# Altium PCB Relay Output.PcbDoc
Units mil, origin at the board's own origin, x right, y up, seen from the top; angles counter-clockwise.
Board outline 3336.61 x 3031.5 mil, 2 copper layers (Top Layer, Bottom Layer); 63 components, 81 nets, 348 pads, 27 vias.
Unrouted connection lines stored in the file: 6.
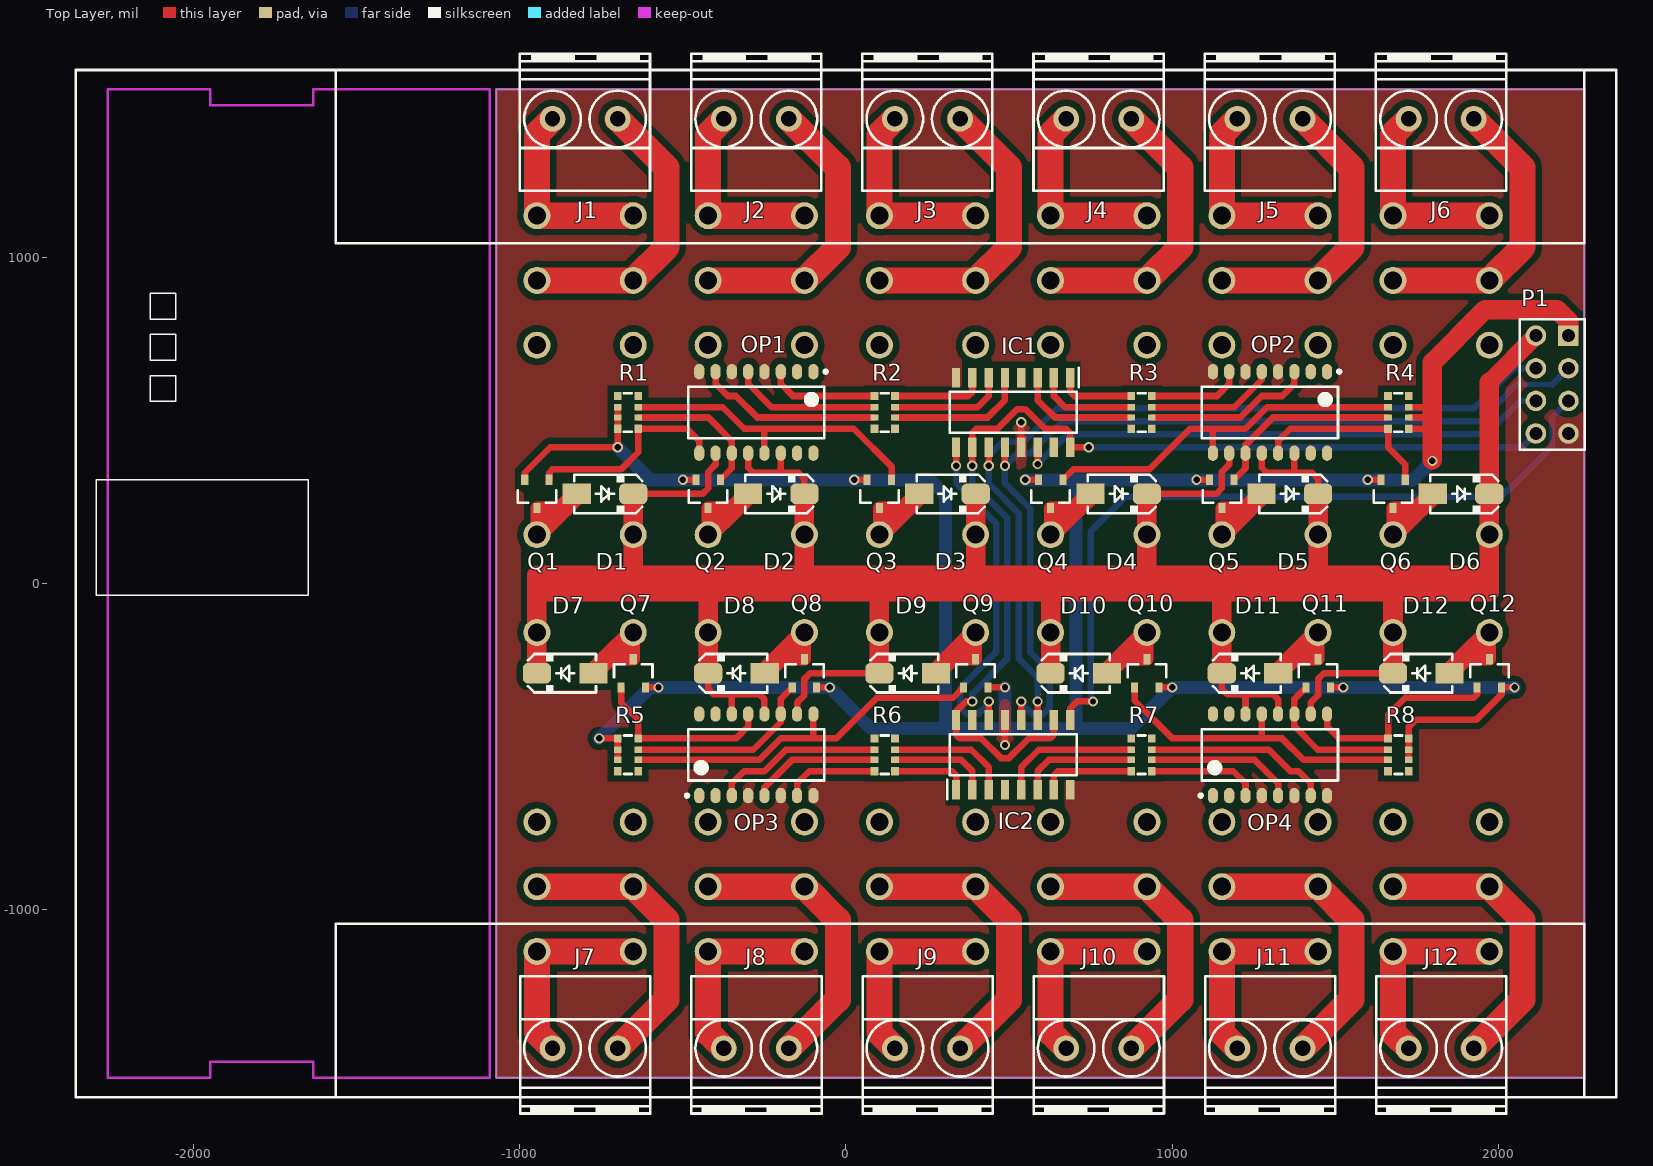
[diagram p0: Top Layer view]
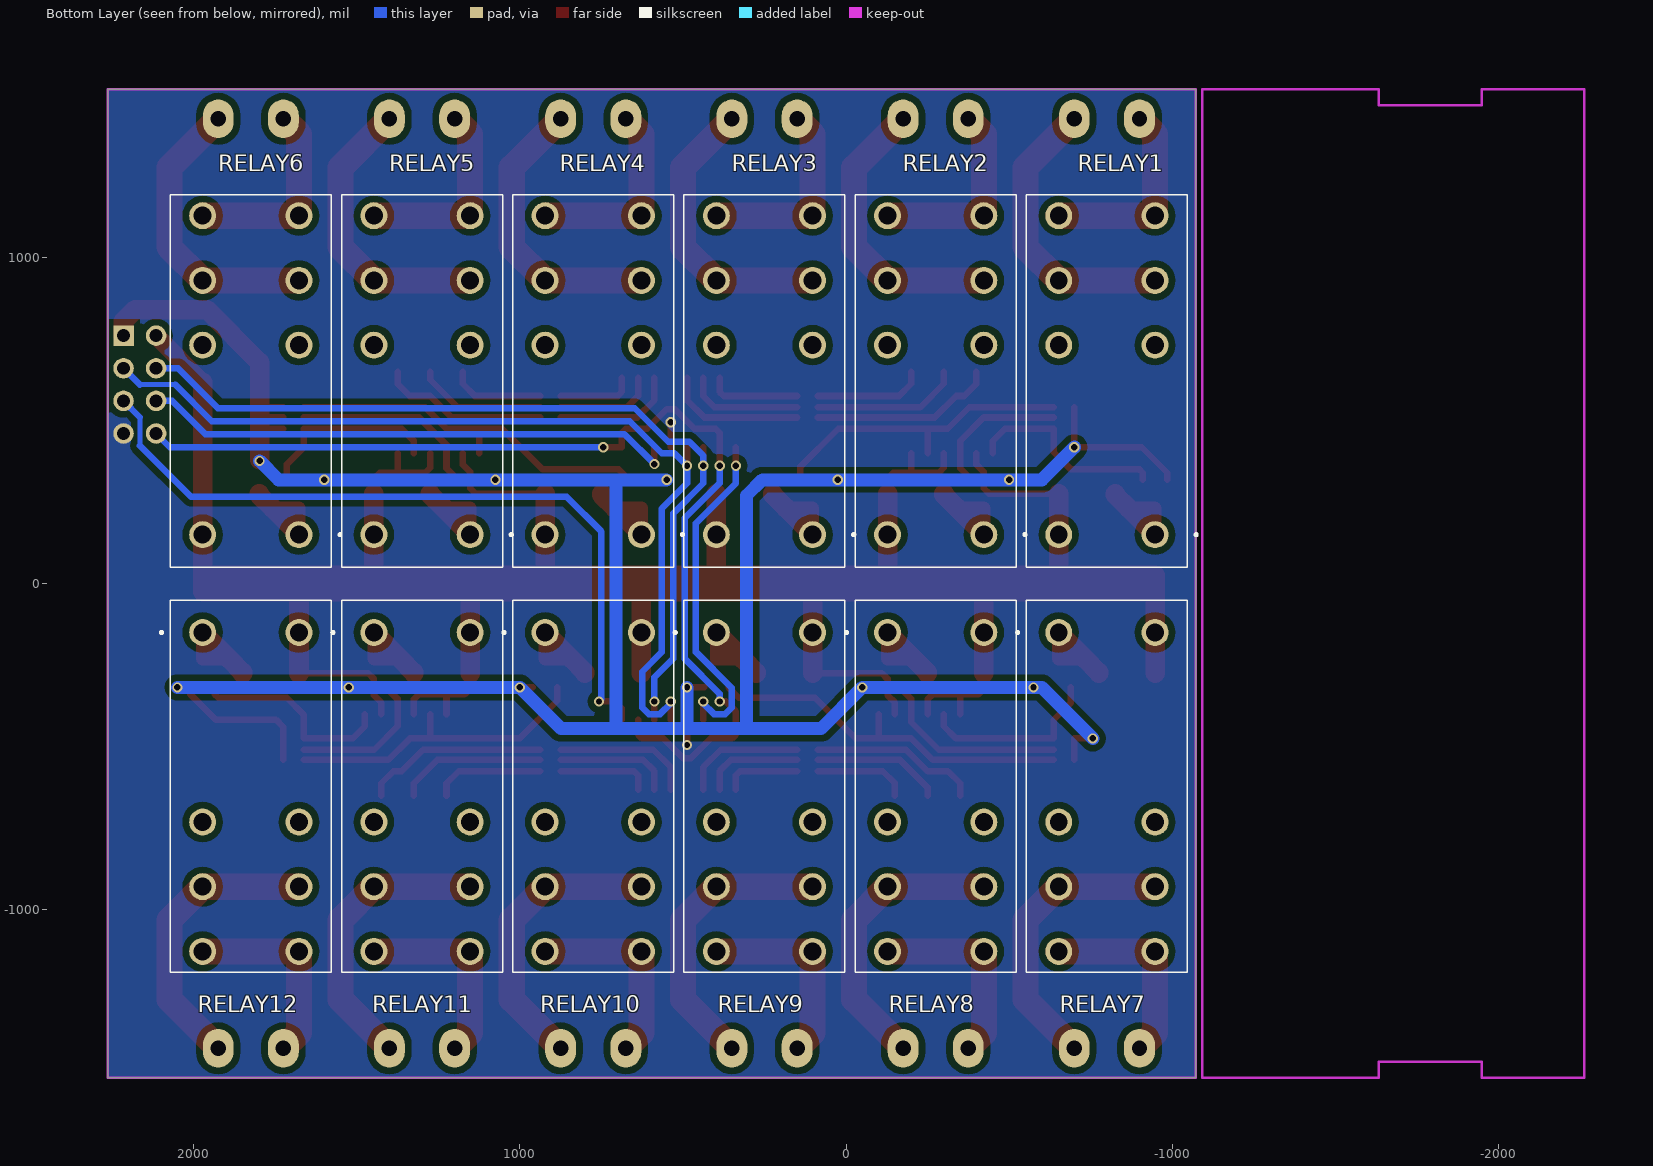
[diagram p1: Bottom Layer view, seen from below]
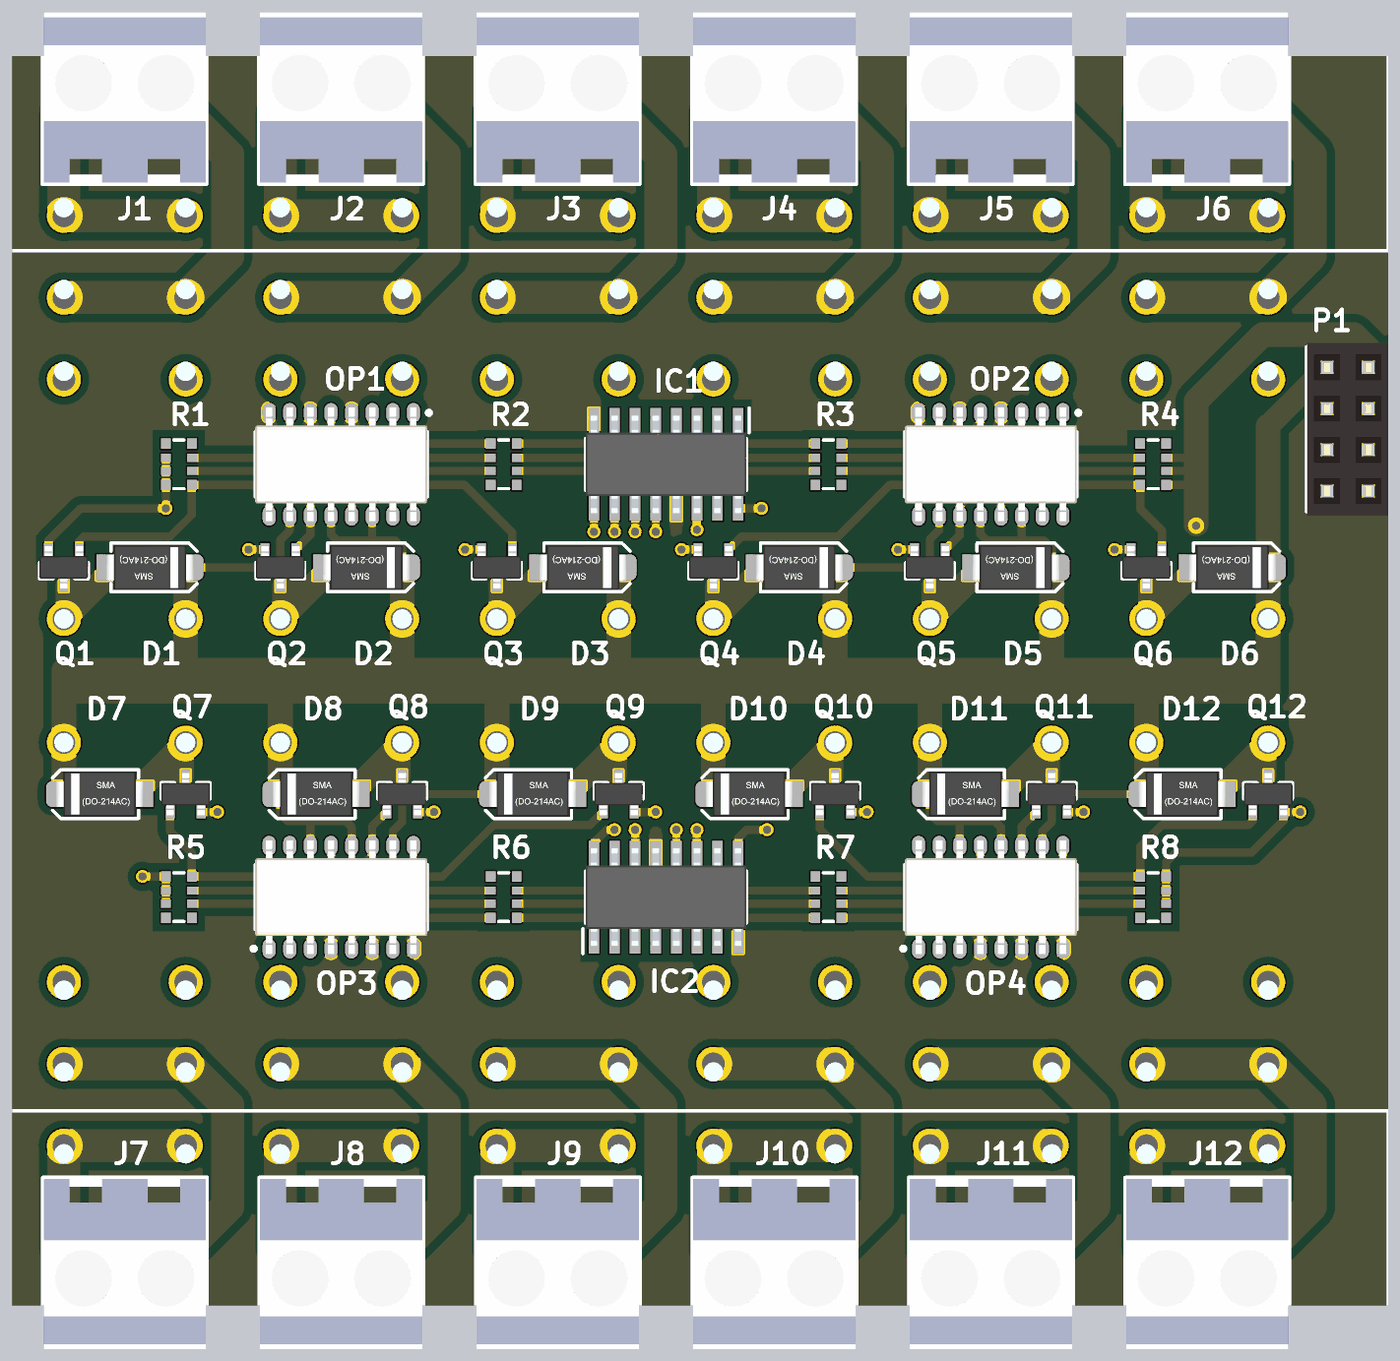
[diagram p2: 3D render of the assembled board from above, using the file's embedded part models]
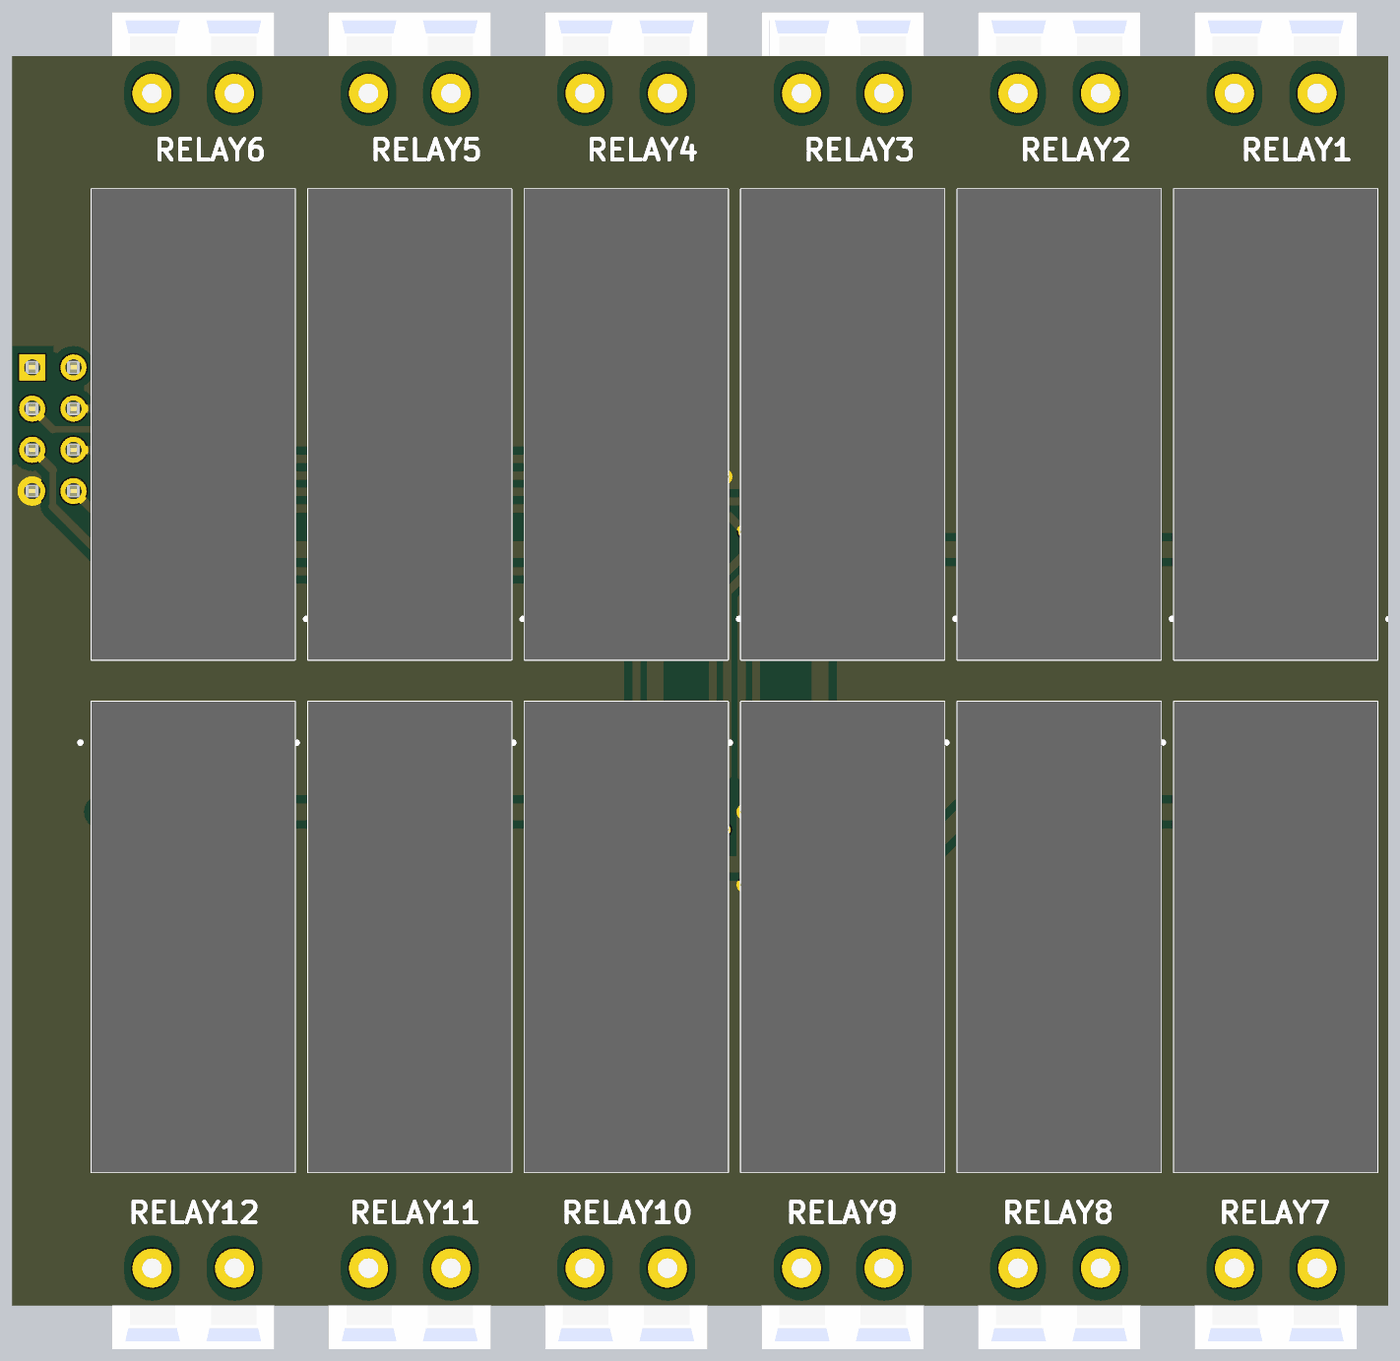
[diagram p3: 3D render of the assembled board from below, using the file's embedded part models]

## Layer stack, top to bottom
Top Solder: solder mask 0.4, Solder Resist, Dk 3.5
Top Layer: signal copper 1.4
Dielectric 1: dielectric 12.6, FR-4, Dk 4.8
Bottom Layer: signal copper 1.4
Bottom Solder: solder mask 0.4, Solder Resist, Dk 3.5

## Board outline
-1072.83,-1515.75 -1072.83,1515.75 2263.78,1515.75 2263.78,-1515.75

## Design rules (kind name [scope] priority, off if disabled: settings)
Clearance Clearance_2 [InNamedPolygon('GND_L02_P036')] p1: gap=20 ignorepadtopadclearanceinfootprint=FALSE
Clearance Clearance_1 [InNamedPolygon('GND_L01_P034')] p2: gap=20 ignorepadtopadclearanceinfootprint=FALSE
Clearance [All] p3: gap=11 ignorepadtopadclearanceinfootprint=FALSE
MinimumSolderMaskSliver [All] p1: minsoldermaskwidth=3
PolygonConnect [All] p1: connectstyle=Direct reliefconductorwidth=10 reliefentries=4 polygonreliefangle="90 Angle" airgapwidth=10
RoutingVias [All] p1: holewidth=28 width=50 viastyle="Through Hole" minholewidth=19.68 minwidth=31.5 maxholewidth=28 maxwidth=50
SilkToSolderMaskClearance [IsPad] p1: minsilkscreentomaskgap=3 clearancetoexposedcopper=TRUE
SolderMaskExpansion [All] p1: expansion=4
Width [All] p1: maxlimit=100 minlimit=10 preferedwidth=20
28 further rules are at their usual default settings.

## Components (designator, comment, footprint, x,y, rotation, side; value= is the part's Value field where it differs from the comment)
D1 "1N4007" D_SMA -738.98,275 r0 top
D2 "1N4007" D_SMA -213.98,275 r0 top
D3 "1N4007" D_SMA 311.02,275 r0 top
D4 "1N4007" D_SMA 836.02,275 r0 top
D5 "1N4007" D_SMA 1361.02,275 r0 top
D6 "1N4007" D_SMA 1886.02,275 r0 top
D7 "1N4007" D_SMA -861.02,-275 r180 top
D8 "1N4007" D_SMA -336.02,-275 r180 top
D9 "1N4007" D_SMA 188.98,-275 r180 top
D10 "1N4007" D_SMA 713.98,-275 r180 top
D11 "1N4007" D_SMA 1238.98,-275 r180 top
D12 "1N4007" D_SMA 1763.98,-275 r180 top
IC1 "SN74HC595D" SOIC127P600X175-16N 512.5,525 r270 top
IC2 "SN74HC595D" SOIC127P600X175-16N 512.5,-525 r90 top
J1 "CONN_TB2" TBG_2 -800,1425 r0 top
J2 "CONN_TB2" TBG_2 -275,1425 r0 top
J3 "CONN_TB2" TBG_2 250,1425 r0 top
J4 "CONN_TB2" TBG_2 775,1425 r0 top
J5 "CONN_TB2" TBG_2 1300,1425 r0 top
J6 "CONN_TB2" TBG_2 1825,1425 r0 top
J7 "CONN_TB2" TBG_2 -800,-1425 r180 top
J8 "CONN_TB2" TBG_2 -275,-1425 r180 top
J9 "CONN_TB2" TBG_2 250,-1425 r180 top
J10 "CONN_TB2" TBG_2 775,-1425 r180 top
J11 "CONN_TB2" TBG_2 1300,-1425 r180 top
J12 "CONN_TB2" TBG_2 1825,-1425 r180 top
OP1 "TLP281-4" "SO16 TOSHIBA OPTOCOUPLER" -275,525 r270 top
OP2 "TLP281-4" "SO16 TOSHIBA OPTOCOUPLER" 1300,525 r270 top
OP3 "TLP281-4" "SO16 TOSHIBA OPTOCOUPLER" -275,-525 r90 top
OP4 "TLP281-4" "SO16 TOSHIBA OPTOCOUPLER" 1300,-525 r90 top
P1 "Header 2X4" "HDR 2X4 F ST 2.54" 2165.35,610.24 r270 top
Q1 "MOSFET N" SOT23 -947.64,275 r270 top
Q2 "MOSFET N" SOT23 -422.64,275 r270 top
Q3 "MOSFET N" SOT23 102.36,275 r270 top
Q4 "MOSFET N" SOT23 627.36,275 r270 top
Q5 "MOSFET N" SOT23 1152.36,275 r270 top
Q6 "MOSFET N" SOT23 1677.36,275 r270 top
Q7 "MOSFET N" SOT23 -652.36,-275 r90 top
Q8 "MOSFET N" SOT23 -127.36,-275 r90 top
Q9 "MOSFET N" SOT23 397.64,-275 r90 top
Q10 "MOSFET N" SOT23 922.64,-275 r90 top
Q11 "MOSFET N" SOT23 1447.64,-275 r90 top
Q12 "MOSFET N" SOT23 1972.64,-275 r90 top
R1 "10KΩ" "RES ARRAY 4X0603 10K" -668.75,525 r90 top
R2 "1KΩ" "RES ARRAY 4X0603 1K" 118.75,525 r90 top
R3 "1KΩ" "RES ARRAY 4X0603 1K" 906.25,525 r270 top
R4 "10KΩ" "RES ARRAY 4X0603 10K" 1693.75,525 r270 top
R5 "10KΩ" "RES ARRAY 4X0603 10K" -668.75,-525 r90 top
R6 "1KΩ" "RES ARRAY 4X0603 1K" 118.75,-525 r90 top
R7 "1KΩ" "RES ARRAY 4X0603 1K" 906.25,-525 r270 top
R8 "10KΩ" "RES ARRAY 4X0603 10K" 1693.75,-525 r270 top
RELAY1 "1-1393243-3" 113932433 -947.64,150 r90 bottom
RELAY2 "1-1393243-3" 113932433 -422.64,150 r90 bottom
RELAY3 "1-1393243-3" 113932433 102.36,150 r90 bottom
RELAY4 "1-1393243-3" 113932433 627.36,150 r90 bottom
RELAY5 "1-1393243-3" 113932433 1152.36,150 r90 bottom
RELAY6 "1-1393243-3" 113932433 1677.36,150 r90 bottom
RELAY7 "1-1393243-3" 113932433 -652.36,-150 r270 bottom
RELAY8 "1-1393243-3" 113932433 -127.36,-150 r270 bottom
RELAY9 "1-1393243-3" 113932433 397.64,-150 r270 bottom
RELAY10 "1-1393243-3" 113932433 922.64,-150 r270 bottom
RELAY11 "1-1393243-3" 113932433 1447.64,-150 r270 bottom
RELAY12 "1-1393243-3" 113932433 1972.64,-150 r270 bottom

## Footprints (in the part's own frame and the unit in brackets; to place one, negate y for a bottom-side part, rotate by r counter-clockwise, add the part's x,y. Pads: shape width x height; smd on the part's side, far side on the other; paste and mask are expansions set on the pad)
113932433 [mm]
  round 2.1 hole 1.4: 11(19.8,0) 12(14.76,0) 14(24.84,0) 21(19.8,7.5) 22(14.76,7.5) 24(24.84,7.5) A1(0,0) A2(0,7.5)
  silkscreen extent -2.52,-3.3 26.48,10.02, body extent -2.52,-2.52 26.48,10.02, height 15.8
D_SMA [mm] "SMA Molded Diode, 2-Leads, Body 4.3x2.7mm, SOD-128"
  rect 2.2x1.6 smd: 1(-2.2,0)
  rrect50% 2.2x1.6 smd: 2(2.2,0)
  silkscreen extent -2.4,-1.5 2.9,1.5, body extent -2.75,-1.4 2.75,1.4, height 2.6
"HDR 2X4 F ST 2.54" [mm]
  rect 1.6x1.6 hole 1: 1(-3.81,1.27)
  round 1.6 hole 1: 2(-3.81,-1.27) 3(-1.27,1.27) 4(-1.27,-1.27) 5(1.27,1.27) 6(1.27,-1.27) 7(3.81,1.27) 8(3.81,-1.27)
  silkscreen extent -5.08,-2.54 5.08,2.54, body extent -5.33,-2.5 5.33,2.5, height 8.5
"RES ARRAY 4X0603 1K" [mm]
  rect 0.65x0.6 smd: 1(-1.275,-0.8) 4(1.275,-0.8) 5(1.275,0.8) 8(-1.275,0.8)
  rect 0.5x0.6 smd: 2(-0.4,-0.8) 3(0.4,-0.8) 6(0.4,0.8) 7(-0.4,0.8)
  silkscreen extent -1.5,-0.3 1.5,0.3, body extent -1.6,-0.8 1.6,0.8, height 0.56
"RES ARRAY 4X0603 10K" [mm]
  rect 0.65x0.6 smd: 1(-1.275,-0.8) 4(1.275,-0.8) 5(1.275,0.8) 8(-1.275,0.8)
  rect 0.5x0.6 smd: 2(-0.4,-0.8) 3(0.4,-0.8) 6(0.4,0.8) 7(-0.4,0.8)
  silkscreen extent -1.5,-0.3 1.5,0.3, body extent -1.6,-0.8 1.6,0.8, height 0.56
"SO16 TOSHIBA OPTOCOUPLER" [mm] "SOIC, 16-Leads, Body 10.35x4.60mm, Pitch 1.27mm, IPC High Density"
  oval 1.2x0.8 smd: 1(-3.175,4.445) 2(-3.175,3.175) 3(-3.175,1.905) 4(-3.175,0.635) 5(-3.175,-0.635) 6(-3.175,-1.905) 7(-3.175,-3.175) 8(-3.175,-4.445) 9(3.175,-4.445) 10(3.175,-3.175) 11(3.175,-1.905) 12(3.175,-0.635) 13(3.175,0.635) 14(3.175,1.905) 15(3.175,3.175) 16(3.175,4.445)
  silkscreen extent -3.3,-5.3 2,5.52, body extent -3.5,-5.3 3.5,5.3, height 2.2
SOIC127P600X175-16N [mm]
  rect 1.525x0.65 smd: 1(-2.712,4.445) 2(-2.712,3.175) 3(-2.712,1.905) 4(-2.712,0.635) 5(-2.712,-0.635) 6(-2.712,-1.905) 7(-2.712,-3.175) 8(-2.712,-4.445) 9(2.712,-4.445) 10(2.712,-3.175) 11(2.712,-1.905) 12(2.712,-0.635) 13(2.712,0.635) 14(2.712,1.905) 15(2.712,3.175) 16(2.712,4.445)
  silkscreen extent -3.47,-4.95 1.6,5.12, body extent -3,-4.95 3,4.95, height 1.75
SOT23 [mm] "SOT23, 3-Leads, Body 2.90x2.45mm, Pitch 0.95mm, IPC High Density"
  rect 0.8x0.55 smd: 1(-1.1,0.95) 2(-1.1,-0.95) 3(1.1,0)
  silkscreen extent -0.3,-1.5 0.7,1.5, body extent -1.3,-1.5 1.3,1.5, height 1.1
TBG_2 [mm] "Terminal Block Green"
  round 2 / inner round 2 / far side oval 2.4x3 hole 1.2: 1(-2.54,0) 2(2.54,0)
  silkscreen extent -5.08,-5.6 5.05,5.08, body extent -5,-5.5 5,5, height 14

## Part data
D1 D2 D3 D4 D5 D6 D7 D8 D9 D10 D11 D12: library part DIODE_SMD_1N4007, "DIODE, GENERAL PURPOSE, 1000V/1A", =http://www.chila.ir, ASSEMBLY=ASSEMBLY, DESC=DESCRIPTION, MANF=Kingtronics, MANF_P#=M7, PARAM="1000V VRRM", PARAM2=1A, PRICE=PRICE
IC1 IC2: "8-Bit Shift Register With 3-State Output Register", Case=SOIC16, Manufacturer="TEXAS INSTRUMENTS", Author="CERN DEM JLC", Bonding=No, ComponentHeight=1.75mm, Component Type=Standard, CreateDate=6/5/2012, Device=SN74HC595D, HelpURL=\\cern.ch\dfs\Applications\Altium\Datasheets\SN74HC595D.pdf, LatestRevisionDate=6/5/2012, Manufacturer Part Number=SN74HC595D, Mounted=Yes, PackageDescription="SOIC 16, Pitch 1.27mm - Body 4x10mm, IPC Medium Density", Part Description="8-Bit Shift Register With 3-State Output Registers", Part Number=SN74HC595D, Pin Count=16, PressFit=No, Sense=No, SMD=Yes, Socket=No
J1 J2 J3 J4 J5 J6 J7 J8 J9 J10 J11 J12: "CONN, TERMINAL BLOCK, 5.08mm pitch", =http://www.chila.ir
R1 R4 R5 R8: library part "RES ARRAY 10K"
R2 R3 R6 R7: library part "RES ARRAY 1K"
RELAY1 RELAY2 RELAY3 RELAY4 RELAY5 RELAY6 RELAY7 RELAY8 RELAY9 RELAY10 RELAY11 RELAY12: "Connector", Manufacturer_Name="TE Connectivity", Mouser Part Number=655-1-1393243-3, Arrow Part Number=1-1393243-3, Datasheet Link=https://www.mouser.com/datasheet/2/418/NG_DS_RT2_1014-579056.pdf, Height=15.7mm, Manufacturer_Part_Number=1-1393243-3, Mouser Price/Stock=https://www.mouser.co.uk/ProductDetail/TE-Connectivity-Schrack/1-1393243-3?qs=8%252BfS01R0SwJTLBx3JmwCzA%3D%3D

## Via types
v1: diameter 31.5, hole 19.68, Top Layer to Bottom Layer, 27 vias

## Nets (pads, with @x,y where several pads share a name; then routed paths per layer and width w, separated by ;. In a path a pad name is that pad's centre, name@x,y a point inside that pad or via, vN(x,y) a via of type N, cw(c..) or ccw(c..) an arc to the next point about the centre after c; other vN are vias at no path point)
+3.3: IC1.10 IC1.16 IC2.10 IC2.16 P1.8 | length 3299.8
  Top Layer w20: v1(387.5,-361.46) 368.54,-361.46 337.5,-392.5 IC2.16 337.5,-462.5 349.8,-474.8 414.8,-474.8 475,-535 500,-535 560.2,-474.8 625.2,-474.8 637.5,-462.5 IC2.10 ; v1(387.5,361.46) IC1.10 387.5,462.5 399.8,474.8 464.8,474.8 525,535 550,535 610.2,474.8 675.2,474.8 687.5,462.5 IC1.16 v1(744.27,418.23)
  Bottom Layer w20: v1(387.5,-361.46) 387.5,-337.5 495,-230 495,200 387.5,307.5 v1(387.5,361.46) ; v1(744.27,418.23) 2073.35,418.23 P1.8
+VS: D1.2 D2.2 D3.2 D4.2 D5.2 D6.2 D7.2 D8.2 D9.2 D10.2 D11.2 D12.2 OP1.10 OP1.12 OP1.14 OP2.10 OP2.12 OP2.14 OP3.10 OP3.12 OP3.14 OP4.10 OP4.12 OP4.14 P1.2 RELAY1.A2 RELAY2.A2 RELAY3.A2 RELAY4.A2 RELAY5.A2 RELAY6.A2 RELAY7.A2 RELAY8.A2 RELAY9.A2 RELAY10.A2 RELAY11.A2 RELAY12.A2 | length 12754.7
  Top Layer w20: D1.2 -440,275 -422.64,292.36 -422.64,342.36 -400,365 OP1.10 ; D8.2 -422.64,-322.36 -405,-340 -350,-340 ; OP3.14 -350,-340 ; OP1.12 -300,355 -285,340 -200,340 ; OP3.12 -250,-355 -265,-340 -350,-340 ; OP1.14 -200,340 ; OP3.10 -150,-365 -127.36,-342.36 -127.36,-292.36 -110,-275 D9.2 ; D2.2 -127.36,322.36 -145,340 -200,340 ; D4.2 1135,275 1152.36,292.36 1152.36,342.36 1175,365 OP2.10 ; D11.2 1152.36,-322.36 1170,-340 1225,-340 ; OP4.14 1225,-340 ; OP2.12 1275,355 1290,340 1375,340 ; OP4.12 1325,-355 1310,-340 1225,-340 ; OP2.14 1375,340 ; OP4.10 1425,-365 1447.64,-342.36 1447.64,-292.36 1465,-275 D12.2 ; D5.2 1447.64,322.36 1430,340 1375,340
  Top Layer w55: 1972.64,617.52 P1.2
  Top Layer w60: D7.2 RELAY7.A2 -947.64,-25 ; D1.2 RELAY1.A2 -652.36,25 ; D8.2 RELAY8.A2 -422.64,-25 ; D2.2 RELAY2.A2 -127.36,25 ; D9.2 RELAY9.A2 102.36,-25 ; D3.2 RELAY3.A2 397.64,25 ; D10.2 RELAY10.A2 627.36,-25 ; D4.2 RELAY4.A2 922.64,25 ; D11.2 RELAY11.A2 1152.36,-25 ; D5.2 RELAY5.A2 1447.64,25 ; D12.2 RELAY12.A2 1677.36,-25 ; 1972.64,617.52 D6.2 RELAY6.A2 1972.64,25 ; -947.64,-25 -947.64,25 -652.36,25 ; -947.64,-25 -652.36,-25 ; -652.36,-25 -422.64,-25 ; -652.36,-25 -652.36,25 ; -652.36,25 -422.64,25 ; -422.64,-25 -127.36,-25 ; -422.64,-25 -422.64,25 ; -422.64,25 -127.36,25 ; -127.36,-25 102.36,-25 ; -127.36,-25 -127.36,25 ; -127.36,25 102.36,25 ; 102.36,-25 397.64,-25 ; 102.36,-25 102.36,25 ; 102.36,25 397.64,25 ; 397.64,-25 627.36,-25 ; 397.64,-25 397.64,25 ; 397.64,25 627.36,25 ; 627.36,-25 922.64,-25 ; 627.36,-25 627.36,25 ; 627.36,25 922.64,25 ; 922.64,-25 1152.36,-25 ; 922.64,-25 922.64,25 ; 922.64,25 1152.36,25 ; 1152.36,-25 1447.64,-25 ; 1152.36,-25 1152.36,25 ; 1152.36,25 1447.64,25 ; 1447.64,-25 1677.36,-25 ; 1447.64,-25 1447.64,25 ; 1447.64,25 1677.36,25 ; 1677.36,-25 1972.64,-25 1972.64,25 ; 1677.36,-25 1677.36,25 ; 1677.36,25 1972.64,25
-VS: P1.1 Q1.2 Q2.2 Q3.2 Q4.2 Q5.2 Q6.2 Q7.2 Q8.2 Q9.2 Q10.2 Q11.2 Q12.2 R1.6 R1.7 R1.8 R4.5 R4.6 R4.7 R5.5 R5.6 R5.7 R8.6 R8.7 R8.8 | length 9465.7
  Top Layer w20: Q1.2 -985.04,339.96 -907.01,417.99 v1(-700.25,418.03) ; v1(-757.02,-474.8) R5.5 R5.6 R5.7 ; v1(-700.25,418.03) R1.8 R1.7 R1.6 ; Q7.2 v1(-574.96,-318.31) ; v1(-500.04,318.31) Q2.2 ; Q8.2 v1(-49.96,-318.31) ; v1(24.96,318.31) Q3.2 ; Q9.2 v1(487.5,-318.31) ; v1(549.96,318.31) Q4.2 ; Q10.2 v1(1000.04,-318.31) ; v1(1074.96,318.31) Q5.2 ; Q11.2 v1(1525.04,-318.31) ; v1(1599.96,318.31) Q6.2 ; R8.6 R8.7 R8.8 1725.25,-439.75 1747.99,-417.01 1932.99,-417.01 2010.04,-339.96 Q12.2 v1(2050.04,-318.31) ; R4.5 1797.99,474.8 ; R4.6 1797.99,509.25 ; R4.7 1797.99,540.75
  Top Layer w60: v1@1797.99,380 1797.99,474.8 1797.99,509.25 1797.99,540.75 1797.99,677.99 1960,840 2180,840 2215.35,804.65 P1.1
  Bottom Layer w40: v1(-757.02,-474.8) -600.52,-318.31 v1(-574.96,-318.31) v1(-49.96,-318.31) 76.73,-445 305,-445 ; v1(-700.25,418.03) -600.52,318.31 v1(-500.04,318.31) v1(24.96,318.31) 256.69,318.31 305,270 305,-445 ; v1(487.5,-318.31) 487.5,-445 ; v1(549.96,318.31) 705,318.31 ; v1(1798.07,376.14) 1740.24,318.31 v1(1599.96,318.31) v1(1074.96,318.31) 705,318.31 ; v1(2050.04,-318.31) v1(1525.04,-318.31) v1(1000.04,-318.31) 873.35,-445 705,-445 ; 305,-445 487.5,-445 ; 487.5,-445 705,-445 ; 705,-445 705,318.31
GND: IC1.8 IC1.13 IC2.8 IC2.13 OP1.4 OP1.6 OP1.8 OP2.4 OP2.6 OP2.8 OP3.4 OP3.6 OP3.8 OP4.4 OP4.6 OP4.8 P1.7 | length 153.5
  Top Layer w20: v1(487.5,-495) IC2.13 ; IC1.13 v1(537.5,495)
NetD1_1: D1.1 Q1.3 RELAY1.A1 | length 338.9
  Top Layer w40: RELAY1.A1 Q1.3 -865.94,231.69
  Top Layer w60: RELAY1.A1 -865.94,231.69 -825.59,272.05 D1.1
NetD2_1: D2.1 Q2.3 RELAY2.A1 | length 338.9
  Top Layer w40: RELAY2.A1 Q2.3 -340.94,231.69
  Top Layer w60: RELAY2.A1 -340.94,231.69 -300.59,272.05 D2.1
NetD3_1: D3.1 Q3.3 RELAY3.A1 | length 338.9
  Top Layer w40: RELAY3.A1 Q3.3 184.06,231.69
  Top Layer w60: RELAY3.A1 184.06,231.69 224.41,272.05 D3.1
NetD4_1: D4.1 Q4.3 RELAY4.A1 | length 338.9
  Top Layer w40: RELAY4.A1 Q4.3 709.06,231.69
  Top Layer w60: RELAY4.A1 709.06,231.69 749.41,272.05 D4.1
NetD5_1: D5.1 Q5.3 RELAY5.A1 | length 338.9
  Top Layer w40: RELAY5.A1 Q5.3 1234.06,231.69
  Top Layer w60: RELAY5.A1 1234.06,231.69 1274.41,272.05 D5.1
NetD6_1: D6.1 Q6.3 RELAY6.A1 | length 338.9
  Top Layer w40: RELAY6.A1 Q6.3 1759.06,231.69
  Top Layer w60: RELAY6.A1 1759.06,231.69 1799.41,272.05 D6.1
NetD7_1: D7.1 Q7.3 RELAY7.A1 | length 338.9
  Top Layer w40: -734.06,-231.69 Q7.3 RELAY7.A1
  Top Layer w60: D7.1 -774.41,-272.05 -734.06,-231.69 RELAY7.A1
NetD8_1: D8.1 Q8.3 RELAY8.A1 | length 338.9
  Top Layer w40: -209.06,-231.69 Q8.3 RELAY8.A1
  Top Layer w60: D8.1 -249.41,-272.05 -209.06,-231.69 RELAY8.A1
NetD9_1: D9.1 Q9.3 RELAY9.A1 | length 338.9
  Top Layer w40: 315.94,-231.69 Q9.3 RELAY9.A1
  Top Layer w60: D9.1 275.59,-272.05 315.94,-231.69 RELAY9.A1
NetD10_1: D10.1 Q10.3 RELAY10.A1 | length 338.9
  Top Layer w40: 840.94,-231.69 Q10.3 RELAY10.A1
  Top Layer w60: D10.1 800.59,-272.05 840.94,-231.69 RELAY10.A1
NetD11_1: D11.1 Q11.3 RELAY11.A1 | length 338.9
  Top Layer w40: 1365.94,-231.69 Q11.3 RELAY11.A1
  Top Layer w60: D11.1 1325.59,-272.05 1365.94,-231.69 RELAY11.A1
NetD12_1: D12.1 Q12.3 RELAY12.A1 | length 338.9
  Top Layer w40: 1890.94,-231.69 Q12.3 RELAY12.A1
  Top Layer w60: D12.1 1850.59,-272.05 1890.94,-231.69 RELAY12.A1
NetIC1_1: IC1.1 R3.1 | length 236.6
  Top Layer w20: IC1.1 687.5,587.5 699.8,575.2 R3.1
NetIC1_2: IC1.2 R3.2 | length 308.2
  Top Layer w20: IC1.2 637.5,575 671.75,540.75 R3.2
NetIC1_3: IC1.3 R3.3 | length 378.6
  Top Layer w20: IC1.3 587.5,562.5 640.75,509.25 R3.3
NetIC1_5: IC1.5 R2.2 | length 428.6
  Top Layer w20: R2.2 434.25,509.25 487.5,562.5 IC1.5
NetIC1_6: IC1.6 R2.3 | length 358.2
  Top Layer w20: R2.3 403.25,540.75 437.5,575 IC1.6
NetIC1_7: IC1.7 R2.4 | length 286.6
  Top Layer w20: R2.4 375.2,575.2 387.5,587.5 IC1.7
NetIC1_9: IC1.9 IC2.14 | length 1066.6
  Top Layer w20: v1(337.5,361.46) IC1.9 ; IC2.14 v1(437.5,-361.46)
  Bottom Layer w20: v1(337.5,361.46) 337.5,307.5 460,185 460,-210 350,-320 350,-380 370,-400 405,-400 437.5,-367.5 v1(437.5,-361.46)
NetIC1_11: IC1.11 IC2.11 P1.4 | length 2718.4
  Top Layer w20: v1(437.5,361.46) IC1.11 ; IC2.11 v1(587.5,-361.46)
  Bottom Layer w20: v1(587.5,-361.46) 587.5,-287.5 530,-230 530,215 437.5,307.5 v1(437.5,361.46) 437.5,392.5 480,435 545,435 647.99,537.99 1925.79,537.99 2048.03,660.24 P1.4
NetIC1_12: IC1.12 IC2.12 P1.3 | length 2878.9
  Top Layer w20: v1(487.5,361.46) IC1.12 ; IC2.12 v1(537.5,-361.46)
  Bottom Layer w15: 2057.09,610.24 2165.35,610.24
  Bottom Layer w20: v1(537.5,-361.46) 537.5,-367.5 570,-400 605,-400 625,-380 625,-270 565,-210 565,230 487.5,307.5 v1(487.5,361.46) 526.04,400 565,400 662.99,497.99 1944.84,497.99 2057.09,610.24 ; 2165.35,610.24 P1.3
NetIC1_14: IC1.14 P1.6 | length 1659.9
  Top Layer w20: v1(587.5,366.46) IC1.14
  Bottom Layer w20: v1(587.5,366.46) 679.23,458.19 1964.09,458.19 2066.14,560.24 P1.6
NetIC2_1: IC2.1 R6.1 | length 236.6
  Top Layer w20: R6.1 325.2,-575.2 337.5,-587.5 IC2.1
NetIC2_2: IC2.2 R6.2 | length 308.2
  Top Layer w20: R6.2 353.25,-540.75 387.5,-575 IC2.2
NetIC2_3: IC2.3 R6.3 | length 378.6
  Top Layer w20: R6.3 384.25,-509.25 437.5,-562.5 IC2.3
NetIC2_5: IC2.5 R7.2 | length 428.6
  Top Layer w20: IC2.5 537.5,-562.5 590.75,-509.25 R7.2
NetIC2_6: IC2.6 R7.3 | length 358.2
  Top Layer w20: IC2.6 587.5,-575 621.75,-540.75 R7.3
NetIC2_7: IC2.7 R7.4 | length 286.6
  Top Layer w20: IC2.7 637.5,-587.5 649.8,-575.2 R7.4
NetIC2_9: IC2.9 P1.5 | length 2320.8
  Top Layer w20: IC2.9 687.5,-382.5 708.54,-361.46 v1(757.5,-361.46)
  Bottom Layer w15: 2165.35,423.23 2165.35,510.24
  Bottom Layer w20: v1(757.5,-361.46) 750,-353.96 750,159.45 856.3,265.75 2007.87,265.75 2165.35,423.23 ; 2165.35,510.24 P1.5
NetJ1_1: J1.1 RELAY1.14 RELAY1.24 | length 612.1
  Top Layer w80: J1.1 -947.64,1377.36 RELAY1.14 RELAY1.24
NetJ1_2: J1.2 RELAY1.11 RELAY1.21 | length 895.3
  Top Layer w80: RELAY1.11 RELAY1.21 -550,1031.89 -550,1275 J1.2
NetJ2_1: J2.1 RELAY2.14 RELAY2.24 | length 612.1
  Top Layer w80: J2.1 -422.64,1377.36 RELAY2.14 RELAY2.24
NetJ2_2: J2.2 RELAY2.11 RELAY2.21 | length 895.3
  Top Layer w80: RELAY2.11 RELAY2.21 -25,1031.89 -25,1275 J2.2
NetJ3_1: J3.1 RELAY3.14 RELAY3.24 | length 612.1
  Top Layer w80: J3.1 102.36,1377.36 RELAY3.14 RELAY3.24
NetJ3_2: J3.2 RELAY3.11 RELAY3.21 | length 895.3
  Top Layer w80: RELAY3.11 RELAY3.21 500,1031.89 500,1275 J3.2
NetJ4_1: J4.1 RELAY4.14 RELAY4.24 | length 612.1
  Top Layer w80: J4.1 627.36,1377.36 RELAY4.14 RELAY4.24
NetJ4_2: J4.2 RELAY4.11 RELAY4.21 | length 895.3
  Top Layer w80: RELAY4.11 RELAY4.21 1025,1031.89 1025,1275 J4.2
NetJ5_1: J5.1 RELAY5.14 RELAY5.24 | length 612.1
  Top Layer w80: J5.1 1152.36,1377.36 RELAY5.14 RELAY5.24
NetJ5_2: J5.2 RELAY5.11 RELAY5.21 | length 895.3
  Top Layer w80: RELAY5.11 RELAY5.21 1550,1031.89 1550,1275 J5.2
NetJ6_1: J6.1 RELAY6.14 RELAY6.24 | length 612.1
  Top Layer w80: J6.1 1677.36,1377.36 RELAY6.14 RELAY6.24
NetJ6_2: J6.2 RELAY6.11 RELAY6.21 | length 895.3
  Top Layer w80: RELAY6.11 RELAY6.21 2075,1031.89 2075,1275 J6.2
NetJ7_1: J7.1 RELAY7.11 RELAY7.21 | length 895.3
  Top Layer w80: RELAY7.21 RELAY7.11 -550,-1031.89 -550,-1275 J7.1
NetJ7_2: J7.2 RELAY7.14 RELAY7.24 | length 612.1
  Top Layer w80: J7.2 -947.64,-1377.36 RELAY7.24 RELAY7.14
NetJ8_1: J8.1 RELAY8.11 RELAY8.21 | length 895.3
  Top Layer w80: RELAY8.21 RELAY8.11 -25,-1031.89 -25,-1275 J8.1
NetJ8_2: J8.2 RELAY8.14 RELAY8.24 | length 612.1
  Top Layer w80: J8.2 -422.64,-1377.36 RELAY8.24 RELAY8.14
NetJ9_1: J9.1 RELAY9.11 RELAY9.21 | length 895.3
  Top Layer w80: RELAY9.21 RELAY9.11 500,-1031.89 500,-1275 J9.1
NetJ9_2: J9.2 RELAY9.14 RELAY9.24 | length 612.1
  Top Layer w80: J9.2 102.36,-1377.36 RELAY9.24 RELAY9.14
NetJ10_1: J10.1 RELAY10.11 RELAY10.21 | length 895.3
  Top Layer w80: RELAY10.21 RELAY10.11 1025,-1031.89 1025,-1275 J10.1
NetJ10_2: J10.2 RELAY10.14 RELAY10.24 | length 612.1
  Top Layer w80: J10.2 627.36,-1377.36 RELAY10.24 RELAY10.14
NetJ11_1: J11.1 RELAY11.11 RELAY11.21 | length 895.3
  Top Layer w80: RELAY11.21 RELAY11.11 1550,-1031.89 1550,-1275 J11.1
NetJ11_2: J11.2 RELAY11.14 RELAY11.24 | length 612.1
  Top Layer w80: J11.2 1152.36,-1377.36 RELAY11.24 RELAY11.14
NetJ12_1: J12.1 RELAY12.11 RELAY12.21 | length 895.3
  Top Layer w80: RELAY12.21 RELAY12.11 2075,-1031.89 2075,-1275 J12.1
NetJ12_2: J12.2 RELAY12.14 RELAY12.24 | length 612.1
  Top Layer w80: J12.2 1677.36,-1377.36 RELAY12.24 RELAY12.14
NetOP1_3: OP1.3 R2.5 | length 340.2
  Top Layer w20: OP1.3 -200,612.5 -162.7,575.2 R2.5
NetOP1_5: OP1.5 R2.6 | length 454.5
  Top Layer w20: OP1.5 -300,612.5 -228.25,540.75 R2.6
NetOP1_7: OP1.7 R2.7 | length 567.5
  Top Layer w20: OP1.7 -400,612.5 -362.7,575.2 -337.7,575.2 -271.75,509.25 R2.7
NetOP1_9: OP1.9 Q1.1 R1.1 | length 632.8
  Top Layer w20: Q1.1 -910.24,339.76 -900,350 -690,350 -637.25,402.75 R1.1 -487.3,474.8 -450,437.5 OP1.9
NetOP1_11: OP1.11 Q2.1 R1.2 | length 450.8
  Top Layer w20: R1.2 -421.75,509.25 -350,437.5 OP1.11 -350,353.54 Q2.1
NetOP1_13: OP1.13 Q3.1 R1.3 | length 967.8
  Top Layer w20: R1.3 -378.25,540.75 -312.3,474.8 -250,474.8 ; OP1.13 -250,474.8 ; Q3.1 139.76,359.02 23.98,474.8 -250,474.8
NetOP2_3: OP2.3 R3.6 | length 517.5
  Top Layer w20: R3.6 1209.25,509.25 1275.2,575.2 1337.7,575.2 1375,612.5 OP2.3
NetOP2_5: OP2.5 R3.7 | length 397.2
  Top Layer w20: R3.7 1190.75,540.75 1275,625 OP2.5
NetOP2_7: OP2.7 R3.8 | length 290.2
  Top Layer w20: R3.8 1137.7,575.2 1175,612.5 OP2.7
NetOP2_9: OP2.9 Q4.1 R4.2 | length 1164.4
  Top Layer w20: Q4.1 696.46,350 930,350 1054.8,474.8 1125,474.8 ; OP2.9 1125,474.8 ; R4.2 1290.75,540.75 1224.8,474.8 1125,474.8
NetOP2_11: OP2.11 Q5.1 R4.3 | length 593.4
  Top Layer w20: Q5.1 1225,353.54 OP2.11 1225,425 1309.25,509.25 R4.3
NetOP2_13: OP2.13 Q6.1 R4.4 | length 568.5
  Top Layer w20: OP2.13 1325,437.5 1362.3,474.8 R4.4 1662.25,417.75 1714.76,365.24 Q6.1
NetOP3_3: OP3.3 R6.6 | length 517.5
  Top Layer w20: OP3.3 -350,-612.5 -312.7,-575.2 -250.2,-575.2 -184.25,-509.25 R6.6
NetOP3_5: OP3.5 R6.7 | length 397.2
  Top Layer w20: OP3.5 -250,-625 -165.75,-540.75 R6.7
NetOP3_7: OP3.7 R6.8 | length 290.2
  Top Layer w20: OP3.7 -150,-612.5 -112.7,-575.2 R6.8
NetOP3_9: OP3.9 Q9.1 R5.2 | length 1164.4
  Top Layer w20: R5.2 -265.75,-540.75 -199.8,-474.8 -100,-474.8 ; OP3.9 -100,-474.8 ; Q9.1 328.54,-350 95,-350 -29.8,-474.8 -100,-474.8
NetOP3_11: OP3.11 Q8.1 R5.3 | length 593.4
  Top Layer w20: R5.3 -284.25,-509.25 -200,-425 OP3.11 -200,-353.54 Q8.1
NetOP3_13: OP3.13 Q7.1 R5.4 | length 568.5
  Top Layer w20: Q7.1 -689.76,-365.24 -637.25,-417.75 R5.4 -337.3,-474.8 -300,-437.5 OP3.13
NetOP4_3: OP4.3 R7.5 | length 340.2
  Top Layer w20: R7.5 1187.7,-575.2 1225,-612.5 OP4.3
NetOP4_5: OP4.5 R7.6 | length 454.5
  Top Layer w20: R7.6 1253.25,-540.75 1325,-612.5 OP4.5
NetOP4_7: OP4.7 R7.7 | length 567.5
  Top Layer w20: R7.7 1296.75,-509.25 1362.7,-575.2 1387.7,-575.2 1425,-612.5 OP4.7
NetOP4_9: OP4.9 Q12.1 R8.1 | length 632.8
  Top Layer w20: OP4.9 1475,-437.5 1512.3,-474.8 R8.1 1662.25,-402.75 1715,-350 1925,-350 1935.24,-339.76 Q12.1
NetOP4_11: OP4.11 Q11.1 R8.2 | length 450.8
  Top Layer w20: Q11.1 1375,-353.54 OP4.11 1375,-437.5 1446.75,-509.25 R8.2
NetOP4_13: OP4.13 Q10.1 R8.3 | length 967.8
  Top Layer w20: Q10.1 885.24,-359.02 1001.02,-474.8 1275,-474.8 ; OP4.13 1275,-474.8 ; R8.3 1403.25,-540.75 1337.3,-474.8 1275,-474.8
pads on no net: IC1.4 IC1.15 IC2.4 IC2.15 OP1.1 OP1.2 OP1.15 OP1.16 OP2.1 OP2.2 OP2.15 OP2.16 OP3.1 OP3.2 OP3.15 OP3.16 OP4.1 OP4.2 OP4.15 OP4.16 R1.4 R1.5 R2.1 R2.8 R3.4 R3.5 R4.1 R4.8 R5.1 R5.8 R6.4 R6.5 R7.1 R7.8 R8.4 R8.5 RELAY1.12 RELAY1.22 RELAY2.12 RELAY2.22 RELAY3.12 RELAY3.22 RELAY4.12 RELAY4.22 RELAY5.12 RELAY5.22 RELAY6.12 RELAY6.22 RELAY7.12 RELAY7.22 RELAY8.12 RELAY8.22 RELAY9.12 RELAY9.22 RELAY10.12 RELAY10.22 RELAY11.12 RELAY11.22 RELAY12.12 RELAY12.22

## Polygon pours and split planes (outlines as drawn)
GND on Top Layer "GND_L01_P034" (solid, remove dead copper, pour order 34): -1072.83,1515.75 2263.78,1515.75 2263.78,-1515.75 -1072.83,-1515.75
GND on Bottom Layer "GND_L02_P036" (solid, remove dead copper, pour order 36): -1072.83,1515.75 2263.78,1515.75 2263.78,-1515.75 -1072.83,-1515.75

## Keep-outs
Keep-Out Layer:
  lines w7.87: -2263.78,-1515.75 -2263.78,1515.75 -1948.82,1515.75 -1948.82,1466.54 -1633.86,1466.54 -1633.86,1515.75 -1092.52,1515.75 -1092.52,-1515.75 -1633.86,-1515.75 -1633.86,-1466.54 -1948.82,-1466.54 -1948.82,-1515.75 -2263.78,-1515.75 ; -1072.83,-1515.75 -1072.83,1515.75 2263.78,1515.75 2263.78,-1515.75 -1072.83,-1515.75

## Other copper
Top Layer:
  pour cut-out: -817.01,-326.5 -922.01,-326.5 -922.01,-297.01 -817.01,-297.01
  pour cut-out: 2023.01,-72.01 2023.01,-107.99 1997.01,-107.99 1997.01,-72.01
  pour cut-out: 2012.98,-227.99 2012.98,-282.99 1987.01,-282.99 1987.01,-227.99
  pour cut-out: -987.98,227.99 -987.98,282.99 -962.01,282.99 -962.01,227.99
  pour cut-out: -998.07,22.99 -998.07,107.99 -972.01,107.99 -972.01,22.99

## Silkscreen, mask and mechanical layers (free items; w line width, h text height)
Top Overlay:
  lines w3.94: -2299.21,-35.43 -2299.21,318.9 -1649.61,318.9 -1649.61,-35.43 -2299.21,-35.43 ; -2133.86,559.06 -2133.86,637.8 -2055.12,637.8 -2055.12,559.06 -2133.86,559.06 ; -2133.86,685.04 -2133.86,763.78 -2055.12,763.78 -2055.12,685.04 -2133.86,685.04 ; -2133.86,811.02 -2055.12,811.02 -2055.12,889.76 -2133.86,889.76 -2133.86,811.02
  lines w7.87: -1564.96,-1574.8 -1564.96,-1043.31 2263.78,-1043.31 2263.78,-1574.8 ; -1564.96,1574.8 -1564.96,1043.31 2263.78,1043.31 2263.78,1574.8 ; -2362.2,-1574.8 -2362.2,1574.8 2362.2,1574.8 2362.2,-1574.8 -2362.2,-1574.8